# Altium PCB BUS.PcbDoc
Units mm, origin at the board's own origin, x right, y up, seen from the top; angles counter-clockwise.
Board outline 148 x 105 mm, 2 copper layers (Top Layer, Bottom Layer); 107 components, 66 nets, 411 pads, 108 vias.
Unrouted connection lines stored in the file: 1.
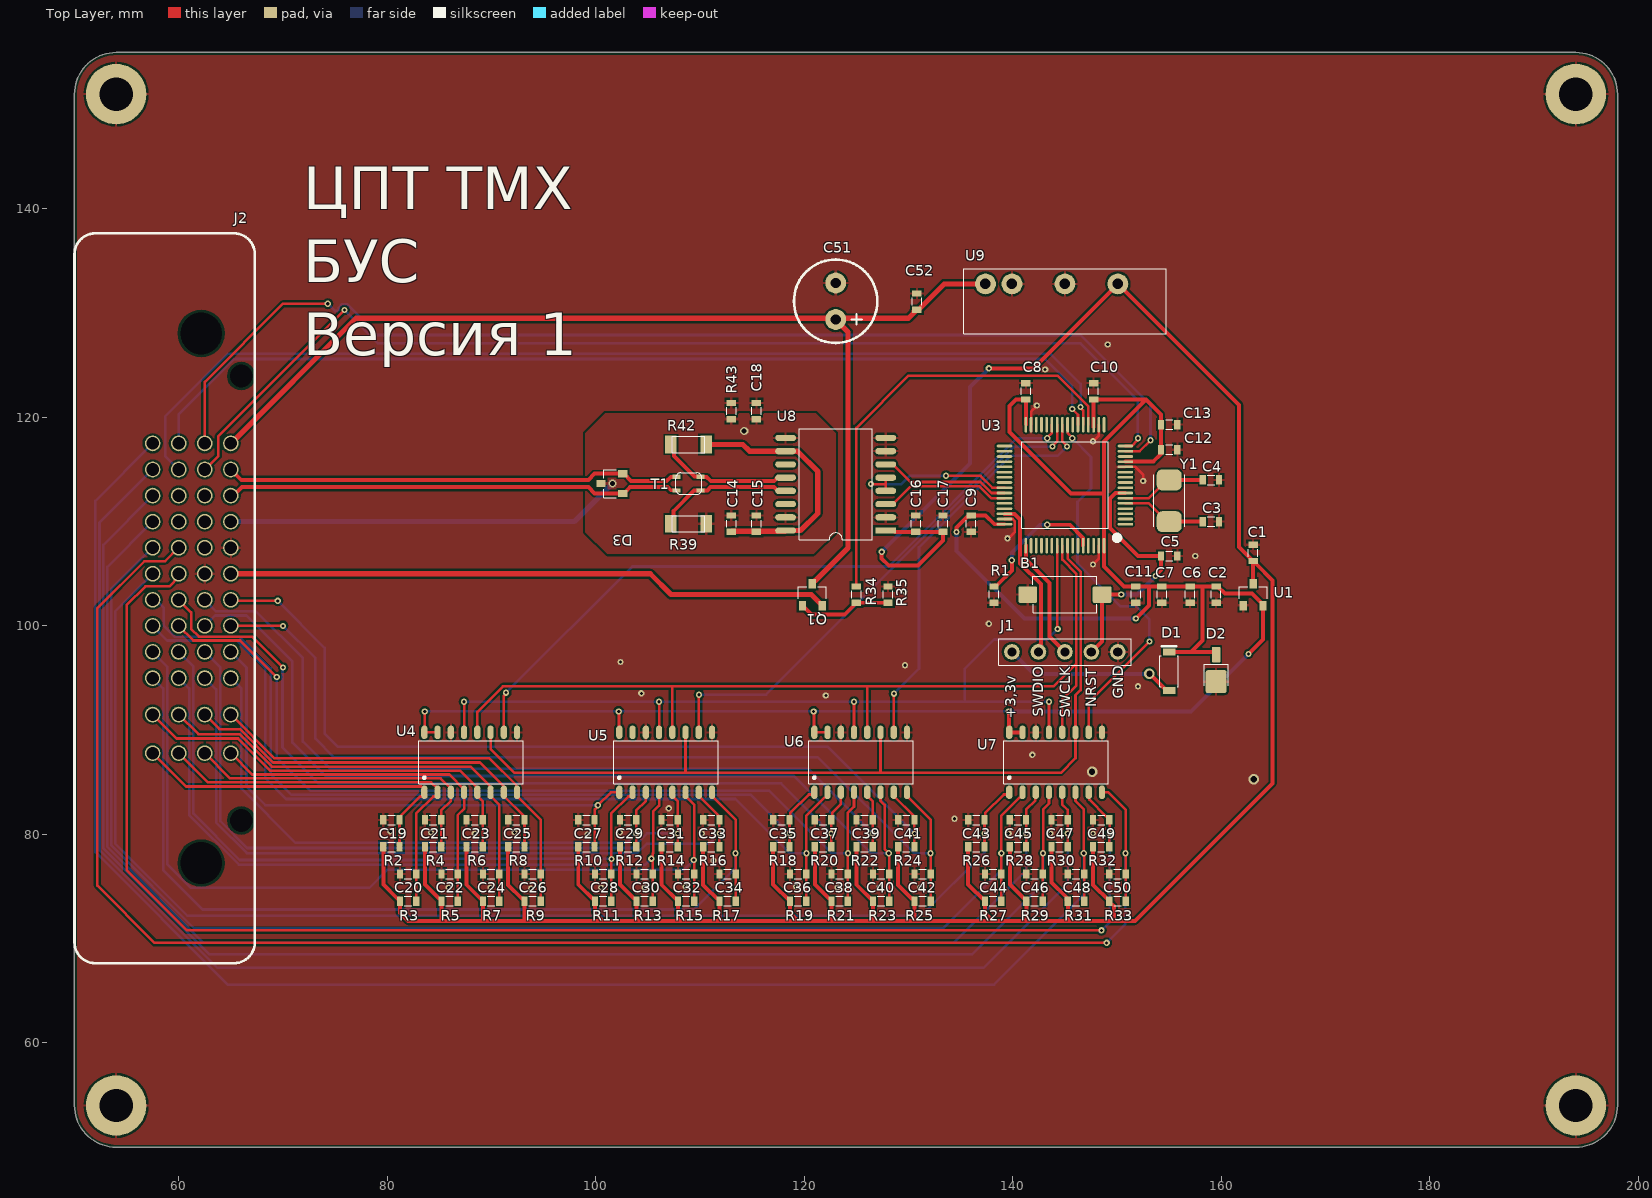
[diagram p0: Top Layer view]
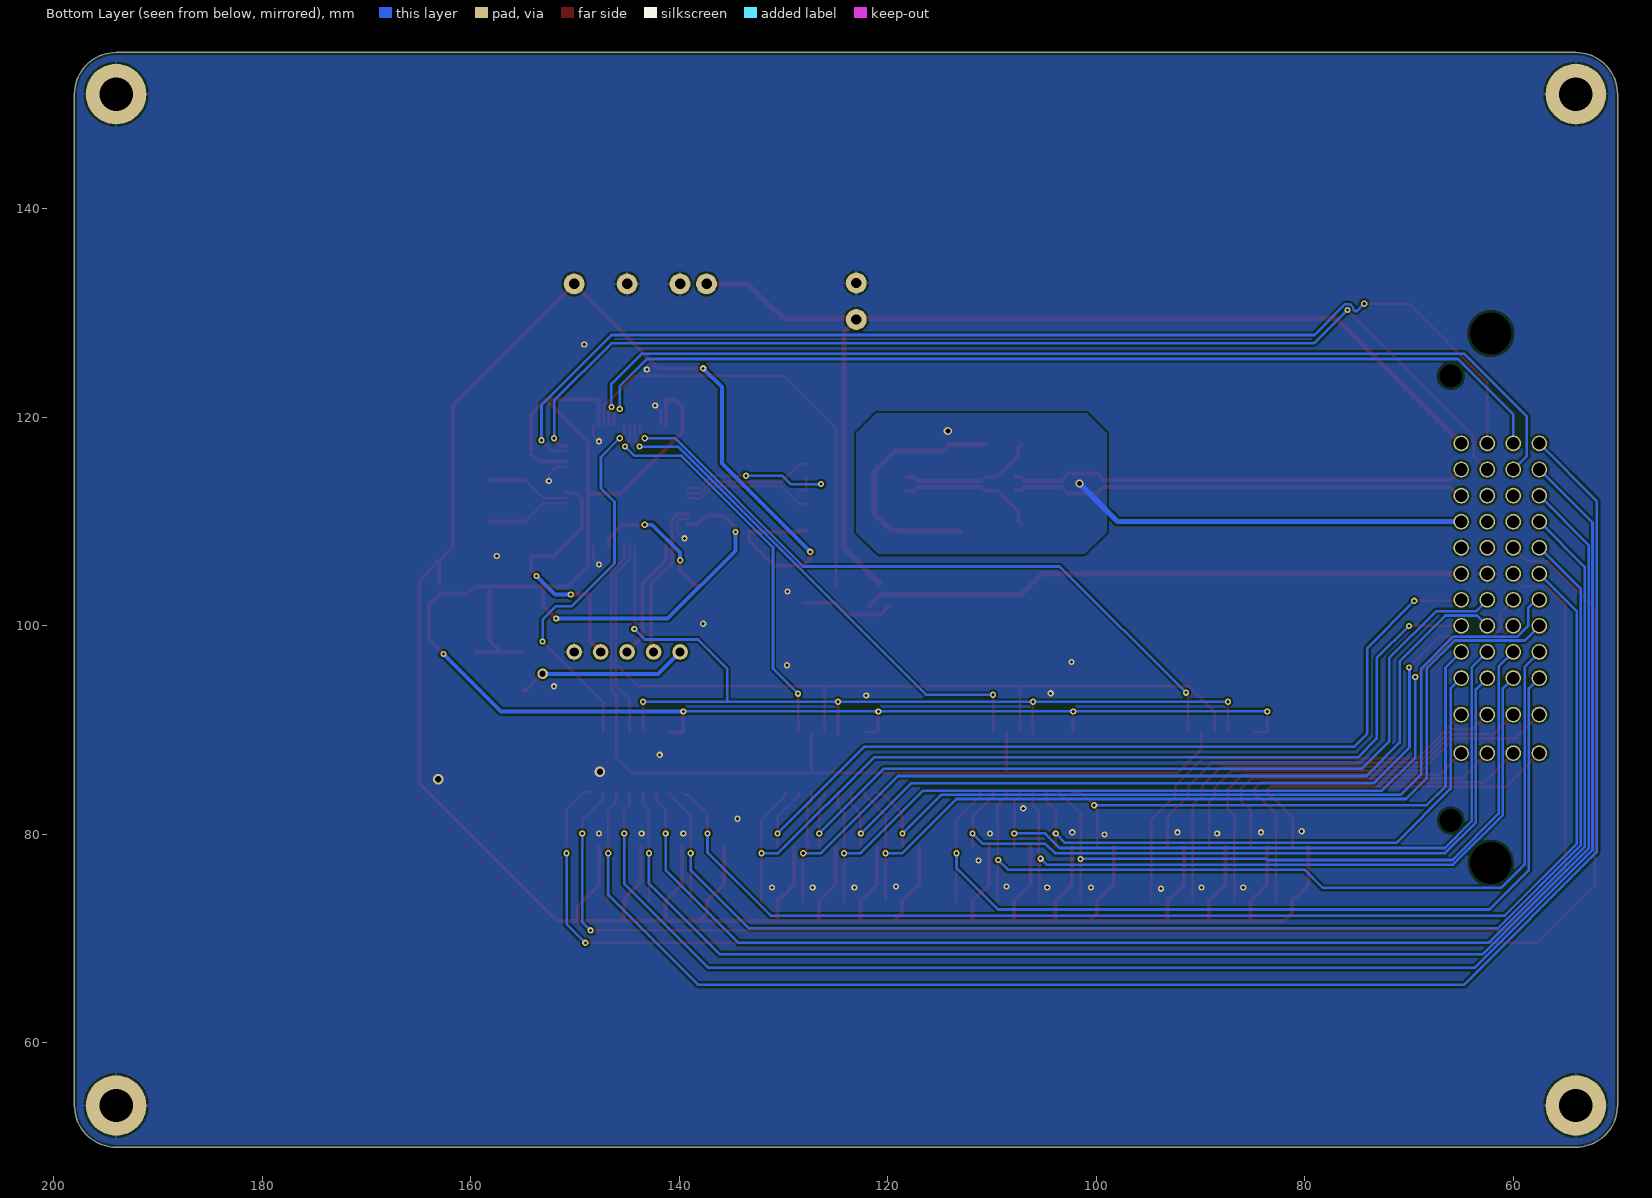
[diagram p1: Bottom Layer view, seen from below]
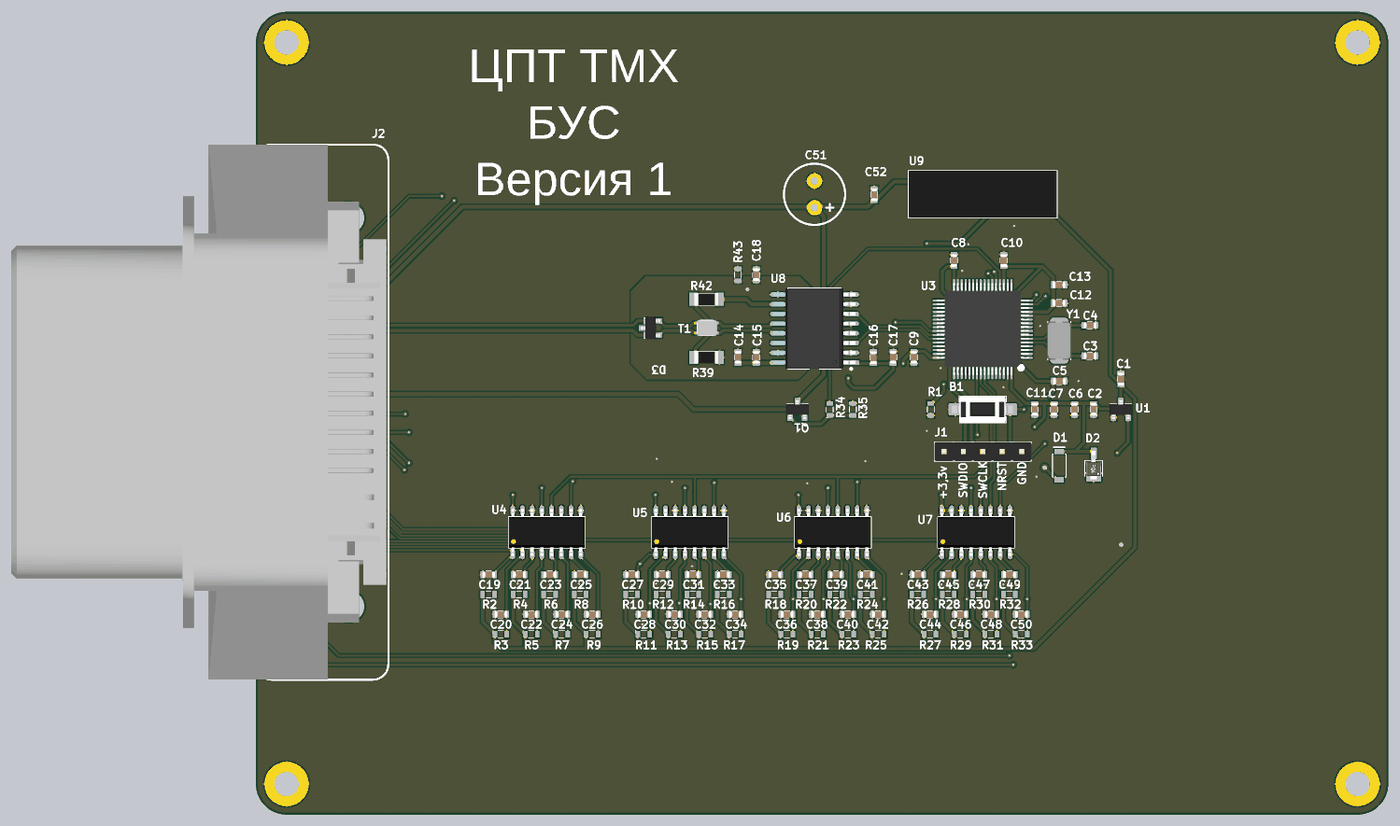
[diagram p2: 3D render of the assembled board from above, using the file's embedded part models]

## Layer stack, top to bottom
Top Solder: solder mask 0.0102, Solder Resist, Dk 3.5
Top Layer: signal copper 0.0356
Dielectric 1: dielectric 0.32, FR-4, Dk 4.8
Bottom Layer: signal copper 0.0356
Bottom Solder: solder mask 0.0102, Solder Resist, Dk 3.5

## Board outline
50,54 50,151 cw(c54,151) 54,155 194,155 cw(c194,151) 198,151 198,54 cw(c194,54) 194,50 54,50 cw(c54,54)

## Design rules (kind name [scope] priority, off if disabled: settings)
AcuteAngle [All] p1: minimum=3.50000000000000E+0001 checktracksonly=FALSE
BoardOutlineClearance "BoardOutlineClearance 1" [All] p1: gap=0.25 ignorepadtopadclearanceinfootprint=FALSE except(0: Arc-SplitContinuation Track-SplitContinuation SMDPad-SplitContinuation THPad-SplitContinuation Via-SplitContinuation Fill-SplitContinuation Poly-SplitContinuation Region-SplitContinuation Text-SplitContinuation) // Milling
Clearance "Clearance-1 1/2 Oz" [All] p1: gap=0.125 ignorepadtopadclearanceinfootprint=FALSE except(0.2: Arc-Fill Arc-Poly Track-Fill Track-Poly SMDPad-SMDPad SMDPad-Fill SMDPad-Poly THPad-Fill THPad-Poly Via-Fill Via-Poly Fill-Fill Fill-Poly Poly-Poly Poly-Region Poly-Text; 0.25: Arc-Hole Track-Hole SMDPad-Hole THPad-Hole Via-Hole Fill-Hole Poly-Hole Region-Hole Text-Hole) // Standart
ComponentClearance [All] p1: gap=0.1 collisioncheckmode=3 verticalgap=0.1 showdistances=FALSE
DiffPairsRouting "DiffPairsRouting 1/2 Oz" [All] p1: maxlimit=0.254 minlimit=0.125 mostfreqgap=0.254 toplayer_minwidth=0.125 toplayer_maxwidth=0.381 toplayer_prefwidth=0.381 bottomlayer_minwidth=0.125 bottomlayer_maxwidth=0.381 bottomlayer_prefwidth=0.381 maxuncoupledlength=12.7
Height [All] p1 off: minheight=0 maxheight=25.4 prefheight=12.7
HoleSize "Minimum HoleSize" [IsPad] p1: absolutevalues=TRUE maxlimit=5.9 minlimit=0.6 maxpercent=80.000 minpercent=20.000
HoleSize "Minimum HoleSize VIA 1" [IsVia] p2: absolutevalues=TRUE maxlimit=5.9 minlimit=0.3 maxpercent=80.000 minpercent=20.000 // Standart
HoleToHoleClearance Hole2HoleClearance [All] p1: gap=0.25 allowstackedmicrovias=FALSE
MinimumAnnularRing "Minimum AR VIA Standart" [All] p1: minimumring=0.15
MinimumAnnularRing "Minimum AR PAD Standart" [All] p2: minimumring=0.2
MinimumSolderMaskSliver "SolderMask Bridge Standart" [All] p1: minsoldermaskwidth=0.15 // All Masks
PlaneClearance "PlaneClearance-1 1/2 Oz" [All] p1: clearance=0.2 // Standart
PlaneConnect "TermalConnect-1 1/2 Oz" [All] p1: planeconnectstyle=Relief reliefexpansion=0.2 reliefentries=4 reliefconductorwidth=0.2 reliefairgap=0.2 // Standart
PolygonConnect "PolygonConnect-1 1/2 Oz" [All] p1: thpad.connectstyle=Relief thpad.reliefconductorwidth=0.254 thpad.reliefentries=4 thpad.polygonreliefangle="90 Angle" thpad.airgapwidth=0.2 smdpad.connectstyle=Relief smdpad.reliefconductorwidth=0.254 smdpad.reliefentries=4 smdpad.polygonreliefangle="90 Angle" smdpad.airgapwidth=0.2 via.connectstyle=Direct via.reliefconductorwidth=0.254 via.reliefentries=4 via.polygonreliefangle="90 Angle" via.airgapwidth=0.254 // Standart
RoutingCorners [All] p1 off: cornerstyle=45-Degree minsetback=2.54 maxsetback=2.54
RoutingVias [All] p1: holewidth=0.4 width=0.8 viastyle="Through Hole" minholewidth=0.3 minwidth=0.6 maxholewidth=5.9 maxwidth=8.9
SilkToSilkClearance Silk2SilkClearance [All] p1 off: silktosilkclearance=0.15
SilkToSolderMaskClearance Silk2SolderMaskClearance [IsPad] p1 off: minsilkscreentomaskgap=0.15 clearancetoexposedcopper=TRUE
SolderMaskExpansion SolderMaskExpansion-1 [All] p1: expansion=0.05 istentingtop=FALSE // Standart
UnRoutedNet [All] p1: checkbadconnections=TRUE
Width "Width 1/2 Oz" [All] p1: maxlimit=10 minlimit=0.125 preferedwidth=0.254 checkconnectedcopper=TRUE
18 further rules are at their usual default settings.

## Classes and differential pairs
net class TEMP[1..32]: TEMP1 TEMP2 TEMP3 TEMP4 TEMP5 TEMP6 TEMP7 TEMP8 TEMP9 TEMP10 TEMP11 TEMP12 TEMP13 TEMP14 TEMP15 TEMP16 TEMP17 TEMP18 TEMP19 TEMP20 TEMP21 TEMP22 TEMP23 TEMP24 TEMP25 TEMP26 TEMP27 TEMP28 TEMP29 TEMP30 TEMP31 TEMP32
component class Main: C51 C52 J2 U9
component class Bus: C14 C15 C16 C17 C18 D3 R39 R42 R43 T1 U8
component class ADC_4: C43 C44 C45 C46 C47 C48 C49 C50 R26 R27 R28 R29 R30 R31 R32 R33 U7
component class ADC_3: C35 C36 C37 C38 C39 C40 C41 C42 R18 R19 R20 R21 R22 R23 R24 R25 U6
component class ADC_2: C27 C28 C29 C30 C31 C32 C33 C34 R10 R11 R12 R13 R14 R15 R16 R17 U5
component class ADC_1: C19 C20 C21 C22 C23 C24 C25 C26 R2 R3 R4 R5 R6 R7 R8 R9 U4
component class MCU: B1 C1 C2 C3 C4 C5 C6 C7 C8 C9 C10 C11 C12 C13 D1 D2 J1 Q1 R1 R34 R35 U1 U3 Y1

## Components (designator, comment, footprint, x,y, rotation, side; value= is the part's Value field where it differs from the comment)
B1 "But" "BUTTON 6x3.5" 141.437,103 r90 top
C1 "1uF" "0603 Capicator" 163.05,107 r270 top
C2 "1uF" "0603 Capicator" 159.5,103 r90 top
C3 "10pF" "0603 Capicator" 159,110 r0 top
C4 "10pF" "0603 Capicator" 159,114 r0 top
C5 "0.1uF" "0603 Capicator" 155,106.7 r0 top
C6 "4.7uF" "0603 Capicator" 157,103 r90 top
C7 "0.1uF" "0603 Capicator" 154.3,103 r90 top
C8 "0.1uF" "0603 Capicator" 141.25,122.5 r270 top
C9 "0.1uF" "0603 Capicator" 136,109.8 r90 top
C10 "0.1uF" "0603 Capicator" 147.75,122.5 r270 top
C11 "0.1uF" "0603 Capicator" 151.8,103 r90 top
C12 "10nF" "0603 Capicator" 155,116.9 r180 top
C13 "1uF" "0603 Capicator" 155,119.3 r180 top
C14 "0.1uF" "0603 Capicator" 113,109.8 r90 top
C15 "10uF" "0603 Capicator" 115.4,109.8 r90 top
C16 "10uF" "0603 Capicator" 130.7,109.8 r270 top
C17 "0.1uF" "0603 Capicator" 133.3,109.8 r90 top
C18 "1nF" "0603 Capicator" 115.4,120.6 r90 top
C19 "4.7uF" "0603 Capicator" 80.4,81.4 r0 top
C20 "4.7uF" "0603 Capicator" 82,76.2 r0 top
C21 "4.7uF" "0603 Capicator" 84.393,81.4 r0 top
C22 "4.7uF" "0603 Capicator" 85.98,76.2 r0 top
C23 "4.7uF" "0603 Capicator" 88.387,81.4 r0 top
C24 "4.7uF" "0603 Capicator" 89.96,76.2 r0 top
C25 "4.7uF" "0603 Capicator" 92.38,81.4 r0 top
C26 "4.7uF" "0603 Capicator" 93.94,76.2 r0 top
C27 "4.7uF" "0603 Capicator" 99.1,81.4 r0 top
C28 "4.7uF" "0603 Capicator" 100.7,76.2 r0 top
C29 "4.7uF" "0603 Capicator" 103.093,81.4 r0 top
C30 "4.7uF" "0603 Capicator" 104.68,76.2 r0 top
C31 "4.7uF" "0603 Capicator" 107.087,81.4 r0 top
C32 "4.7uF" "0603 Capicator" 108.66,76.2 r0 top
C33 "4.7uF" "0603 Capicator" 111.08,81.4 r0 top
C34 "4.7uF" "0603 Capicator" 112.64,76.2 r0 top
C35 "4.7uF" "0603 Capicator" 117.8,81.4 r0 top
C36 "4.7uF" "0603 Capicator" 119.4,76.2 r0 top
C37 "4.7uF" "0603 Capicator" 121.793,81.4 r0 top
C38 "4.7uF" "0603 Capicator" 123.38,76.2 r0 top
C39 "4.7uF" "0603 Capicator" 125.787,81.4 r0 top
C40 "4.7uF" "0603 Capicator" 127.36,76.2 r0 top
C41 "4.7uF" "0603 Capicator" 129.78,81.4 r0 top
C42 "4.7uF" "0603 Capicator" 131.34,76.2 r0 top
C43 "4.7uF" "0603 Capicator" 136.5,81.4 r0 top
C44 "4.7uF" "0603 Capicator" 138.1,76.2 r0 top
C45 "4.7uF" "0603 Capicator" 140.493,81.4 r0 top
C46 "4.7uF" "0603 Capicator" 142.08,76.2 r0 top
C47 "4.7uF" "0603 Capicator" 144.487,81.4 r0 top
C48 "4.7uF" "0603 Capicator" 146.06,76.2 r0 top
C49 "4.7uF" "0603 Capicator" 148.48,81.4 r0 top
C50 "4.7uF" "0603 Capicator" 150.04,76.2 r0 top
C51 "120uF" "Bar Cap 8 mm" 123.01,131.137 r0 top
C52 "1uF" "0603 Capicator" 130.8,131.1 r270 top
D1 "Diode" sod-123 154.987,93.8 r90 top
D2 "TVS 3.3V" DO-216AA 159.5,95.75 r90 top
D3 "TVS" SOT-23 102.6,112.7 r90 top
J1 "PLS 5x1" "PLS 5x1" 150.08,97.5 r180 top
J2 "Conn 48" 5007620481 65,117.5 r270 top
Q1 "MOSFET-N" SOT-23 119.825,101.95 r0 top
R1 "3.9k" "0603 Resistor" 138.2,103 r270 top
R2 "300R" "0603 Resistor" 80.4,78.8 r180 top
R3 "300R" "0603 Resistor" 82,73.6 r180 top
R4 "300R" "0603 Resistor" 84.393,78.8 r180 top
R5 "300R" "0603 Resistor" 85.98,73.6 r180 top
R6 "300R" "0603 Resistor" 88.387,78.8 r180 top
R7 "300R" "0603 Resistor" 89.96,73.6 r180 top
R8 "300R" "0603 Resistor" 92.38,78.8 r180 top
R9 "300R" "0603 Resistor" 93.94,73.6 r180 top
R10 "300R" "0603 Resistor" 99.1,78.8 r180 top
R11 "300R" "0603 Resistor" 100.7,73.6 r180 top
R12 "300R" "0603 Resistor" 103.093,78.8 r180 top
R13 "300R" "0603 Resistor" 104.68,73.6 r180 top
R14 "300R" "0603 Resistor" 107.087,78.8 r180 top
R15 "300R" "0603 Resistor" 108.66,73.6 r180 top
R16 "300R" "0603 Resistor" 111.08,78.8 r180 top
R17 "300R" "0603 Resistor" 112.64,73.6 r180 top
R18 "300R" "0603 Resistor" 117.8,78.8 r180 top
R19 "300R" "0603 Resistor" 119.4,73.6 r180 top
R20 "300R" "0603 Resistor" 121.793,78.8 r180 top
R21 "300R" "0603 Resistor" 123.38,73.6 r180 top
R22 "300R" "0603 Resistor" 125.787,78.8 r180 top
R23 "300R" "0603 Resistor" 127.36,73.6 r180 top
R24 "300R" "0603 Resistor" 129.78,78.8 r180 top
R25 "300R" "0603 Resistor" 131.34,73.6 r180 top
R26 "300R" "0603 Resistor" 136.5,78.8 r180 top
R27 "300R" "0603 Resistor" 138.1,73.6 r180 top
R28 "300R" "0603 Resistor" 140.493,78.8 r180 top
R29 "300R" "0603 Resistor" 142.08,73.6 r180 top
R30 "300R" "0603 Resistor" 144.487,78.8 r180 top
R31 "300R" "0603 Resistor" 146.06,73.6 r180 top
R32 "300R" "0603 Resistor" 148.48,78.8 r180 top
R33 "300R" "0603 Resistor" 150.04,73.6 r180 top
R34 "160R" "0603 Resistor" 125,103 r270 top
R35 "1k" "0603 Resistor" 128.025,103 r270 top
R39 "390R" "1206 RESISTOR" 108.9,109.8 r0 top
R42 "390R" "1206 RESISTOR" 108.9,117.4 r180 top
R43 "1M" "0603 Resistor" 113,120.6 r90 top
T1 "ACM2520" ACM2520 110.05,113 r180 top
U1 "LDO 3V" SOT-23 162.1,101.95 r0 top
U3 "STM32F105RCT6" LQFP64 145,113.5 r180 top
U4 "ADC 8-channel" SOIC-16 83.56,84.04 r0 top
U5 "ADC 8-channel" SOIC-16 102.26,84.04 r0 top
U6 "ADC 8-channel" SOIC-16 120.96,84.04 r0 top
U7 "ADC 8-channel" SOIC-16 139.66,84.04 r0 top
U8 "RS-485" SOIC16W 123,113.5 r180 top
U9 "DC/DC" SIP7 137.375,132.8 r90 top
Y1 "8MHz" NX5032GA 155,112 r270 top

## Footprints (in the part's own frame and the unit in brackets; to place one, negate y for a bottom-side part, rotate by r counter-clockwise, add the part's x,y. Pads: shape width x height; smd on the part's side, far side on the other; paste and mask are expansions set on the pad)
"0603 Capicator" [mm]
  rect 0.6x0.9 smd: 1(-0.78,0) 2(0.78,0)
  silkscreen extent -0.35,-0.45 0.35,0.45, body extent -0.82,-0.45 0.88,0.45, height 0.9
"0603 Resistor" [mm]
  rect 0.6x0.9 smd: 1(-0.78,0) 2(0.78,0)
  silkscreen extent -0.35,-0.45 0.35,0.45, body extent -0.85,-0.45 0.85,0.45, height 0.55
"1206 RESISTOR" [mm] "smd"
  rect 1.1x1.7 smd: 1(-1.7,0) 2(1.7,0)
  silkscreen extent -1.55,-0.77 1.55,0.77, body extent -1.55,-0.77 1.55,0.78, height 0.55
5007620481 [mm] "Molex PCB Header 48 pin"
  round 1.5 hole 1.2: 1A(0,0) 1B(2.5,0) 1C(5,0) 1D(7.5,0) 1E(10,0) 1F(12.5,0) 1G(15,0) 1H(17.5,0) 1J(20,0) 1K(22.5,0) 1L(26,0) 1M(29.7,0) 2A(0,-2.5) 2B(2.5,-2.5) 2C(5,-2.5) 2D(7.5,-2.5) 2E(10,-2.5) 2F(12.5,-2.5) 2G(15,-2.5) 2H(17.5,-2.5) 2J(20,-2.5) 2K(22.5,-2.5) 2L(26,-2.5) 2M(29.7,-2.5) 3A(0,-5) 3B(2.5,-5) 3C(5,-5) 3D(7.5,-5) 3E(10,-5) 3F(12.5,-5) 3G(15,-5) 3H(17.5,-5) 3J(20,-5) 3K(22.5,-5) 3L(26,-5) 3M(29.7,-5) 4A(0,-7.5) 4B(2.5,-7.5) 4C(5,-7.5) 4D(7.5,-7.5) 4E(10,-7.5) 4F(12.5,-7.5) 4G(15,-7.5) 4H(17.5,-7.5) 4J(20,-7.5) 4K(22.5,-7.5) 4L(26,-7.5) 4M(29.7,-7.5)
  round 1.524 hole 4: 4(-10.55,-2.85) 7(40.25,-2.85)
  round 1.524 hole 2.2: 5(-6.45,1) 6(36.15,1)
  silkscreen extent -20.15,-15 49.85,2.3, body extent -20.11,-46.98 49.81,2.03, height 27.1
ACM2520 [mm]
  rect 0.8x0.4 smd: 1(0,0) 2(0,-1.3) 3(2.3,-1.3) 4(2.3,0)
  silkscreen extent -0.13,-1.68 2.4,0.38, body extent -0.11,-1.64 2.39,0.36, height 1.24
"Bar Cap 8 mm" [mm]
  round 2 hole 1: 1(0,1.75) 2(0,-1.75)
  silkscreen extent -4,-4 4,4
"BUTTON 6x3.5" [mm]
  rrect20% 1.6x1.8 smd: 1(0,0) 2(0,-7.125)
  silkscreen extent -1.75,-6.63 1.75,-0.48, body extent -1.75,-7.52 1.75,0.48, height 4.3
DO-216AA [mm]
  rrect20% 2.2x2 smd: 1(-1.1,0)
  rrect20% 1.5x0.8 smd: 2(1.5,0)
  silkscreen extent -1.5,-1.15 0.58,1.15, body extent -1.91,-0.93 1.85,0.98, height 1.02
LQFP64 [mm]
  oval 1.5x0.254 smd paste+0 mask+0.02: 1(-5.8,3.75) 2(-5.8,3.25) 3(-5.8,2.75) 4(-5.8,2.25) 5(-5.8,1.75) 6(-5.8,1.25) 7(-5.8,0.75) 8(-5.8,0.25) 9(-5.8,-0.25) 10(-5.8,-0.75) 11(-5.8,-1.25) 12(-5.8,-1.75) 13(-5.8,-2.25) 14(-5.8,-2.75) 15(-5.8,-3.25) 16(-5.8,-3.75) 33(5.8,-3.75) 34(5.8,-3.25) 35(5.8,-2.75) 36(5.8,-2.25) 37(5.8,-1.75) 38(5.8,-1.25) 39(5.8,-0.75) 40(5.8,-0.25) 41(5.8,0.25) 42(5.8,0.75) 43(5.8,1.25) 44(5.8,1.75) 45(5.8,2.25) 46(5.8,2.75) 47(5.8,3.25) 48(5.8,3.75)
  oval 0.254x1.5 smd paste+0 mask+0.02: 17(-3.75,-5.8) 18(-3.25,-5.8) 19(-2.75,-5.8) 20(-2.25,-5.8) 21(-1.75,-5.8) 22(-1.25,-5.8) 23(-0.75,-5.8) 24(-0.25,-5.8) 25(0.25,-5.8) 26(0.75,-5.8) 27(1.25,-5.8) 28(1.75,-5.8) 29(2.25,-5.8) 30(2.75,-5.8) 31(3.25,-5.8) 32(3.75,-5.8) 49(3.75,5.8) 50(3.25,5.8) 51(2.75,5.8) 52(2.25,5.8) 53(1.75,5.8) 54(1.25,5.8) 55(0.75,5.8) 56(0.25,5.8) 57(-0.25,5.8) 58(-0.75,5.8) 59(-1.25,5.8) 60(-1.75,5.8) 61(-2.25,5.8) 62(-2.75,5.8) 63(-3.25,5.8) 64(-3.75,5.8)
  silkscreen extent -5.2,-4.15 4.15,5.25, body extent -6,-6.02 6,5.98, height 1.56
NX5032GA [mm] "Crystal"
  rrect50% 2x2.4 smd: 1(-2,0) 2(2,0)
  silkscreen extent -2.5,-1.5 2.5,1.5, body extent -2.5,-1.6 2.5,1.6, height 1.5
"PLS 5x1" [mm] "Connector; Header; 5 Position"
  round 1.5 hole 0.9: 1(0,0) 2(2.54,0) 3(5.08,0) 4(7.62,0) 5(10.16,0)
  silkscreen extent -1.27,-1.27 11.43,1.27, body extent -1.28,-1.28 11.42,1.26, height 8.54
SIP7 [mm]
  round 2 hole 1: 1(0,0) 2(0,-2.54) 4(0,-7.62) 6(0,-12.7)
  silkscreen extent -4.77,-17.35 1.45,2.1, body extent -4.7,-17.27 1.39,2.03, height 10.16
sod-123 [mm]
  rect 0.7x1.2 smd: 1(0,0) 2(3.7,0)
  silkscreen extent 0.35,-0.9 4.25,0.87, body extent 0,-0.8 3.7,0.8
SOIC16W [mm]
  rect 2x0.6 smd: 1(-4.81,4.36)
  oval 2x0.6 smd: 2(-4.81,3.09) 3(-4.81,1.82) 4(-4.81,0.55) 5(-4.81,-0.72) 6(-4.81,-1.99) 7(-4.81,-3.26) 8(-4.81,-4.53) 9(4.79,-4.53) 10(4.79,-3.26) 11(4.79,-1.99) 12(4.79,-0.72) 13(4.79,0.55) 14(4.79,1.82) 15(4.79,3.09) 16(4.79,4.36)
  round 0.5 on Top Overlay mask+0.051: ""(-4.8,5.2)
  silkscreen extent -3.5,-5.39 3.48,5.21, body extent -5.35,-5.35 5.35,5.15, height 2.65
SOIC-16 [mm]
  oval 0.6x1.3 smd paste+0 mask+0.1: 1(0,0) 2(1.27,0) 3(2.54,0) 4(3.81,0) 5(5.08,0) 6(6.35,0) 7(7.62,0) 8(8.89,0) 9(8.89,5.75) 10(7.62,5.75) 11(6.35,5.75) 12(5.08,5.75) 13(3.81,5.75) 14(2.54,5.75) 15(1.27,5.75) 16(0,5.75)
  silkscreen extent -0.55,0.82 9.48,4.92, body extent -0.53,-0.19 9.44,5.94, height 1.78
SOT-23 [mm]
  rect 0.7x0.9 smd: 1(0,0) 2(1.9,0) 3(0.95,2.1)
  silkscreen extent -0.4,0.65 2.3,1.83, body extent -0.55,-0.17 2.45,2.23, height 1.1

## Part data
B1: library part "Button 2 Conn", "Button 2 Conn SMD", Manufacturer="KLS electronic co ltd", Part Number=L-KLS7-TS3608-5.0-180, ComponentLink1Description=Chip&Dip, ComponentLink1URL=https://www.chipdip.ru/product/kls7-ts3608-5.0-180-td-02xa, Type=Button
C1 C2 C13 C52: library part "Cap 1uF (0603)", "1uF X5R 25V 10% 0603", Manufacturer="Murata Manufacturing", Part Number=GRM188R61E105KAADD, ComponentLink1Description=Chip&Dip, ComponentLink1URL=https://www.chipdip.ru/product/grm188r61e105k, Type=Capacitor
C3 C4: library part "Cap 10pF (0603)", "10pF NP0 50V 5% 0603", Manufacturer="Murata Manufacturing", Part Number=GRM1885C1H100JA01D, ComponentLink1Description=Chip&Dip, ComponentLink1URL=https://www.chipdip.ru/product/grm1885c1h100j, Type=Capacitor
C5 C7 C8 C9 C10 C11 C14 C17: library part "Cap 0.1uF (0603)", "0.1uF X7R 16V 10% 0603", Manufacturer="Murata Manufacturing", Part Number=GRM188R71C104KA01D, ComponentLink1Description=Chip&Dip, ComponentLink1URL=https://www.chipdip.ru/product/grm188r71c104ka01d, Type=Capacitor
C6 C19 C20 C21 C22 C23 C24 C25 C26 C27 C28 C29 C30 C31 C32 C33 C34 C35 C36 C37 C38 C39 C40 C41 C42 C43 C44 C45 C46 C47 C48 C49 C50: library part "Cap 4.7uF (0603)", "4.7uF X5R 25V 10% 0603", Manufacturer="Murata Manufacturing", Part Number=GRM188R61E475KE11D, ComponentLink1Description=Chip&Dip, ComponentLink1URL=https://www.chipdip.ru/product0/9000348448, Type=Capacitor
C12: library part "Cap 10nF (0603)", "10nF X7R  100V 10% 0603", Manufacturer="Murata Manufacturing", Part Number=GRM188R72A103KA01D, ComponentLink1Description=Chip&Dip, ComponentLink1URL=https://www.chipdip.ru/product/grm188r72a103ka01d, Type=Capacitor
C15 C16: library part "Cap 10uF (0603)", "10uF X5R 25V 20% 0603", Manufacturer="Murata Manufacturing", Part Number=GRM188R61E106M, ComponentLink1Description=Chip&Dip, ComponentLink1URL=https://www.chipdip.ru/product/grm188r61e106m, Type=Capacitor
C18: library part "Cap 1nF (0603)", "X7R 1nF 100V 10% 0603", Manufacturer="Murata Manufacturing", Part Number=GRM188R72A102KA01D, ComponentLink1Description=Chip&Dip, ComponentLink1URL=https://www.chipdip.ru/product/grm188r72a102ka01d, Type=Capacitor
C51: library part "Cap Pol 120uF", "Polymer capacitor with low E.S.R. Rated voltage - 80V.", Manufacturer=Matsushita, PartNumber=EEU-FS1K121LB, ComponentLink1Description=ChipDip, ComponentLink1URL=https://www.chipdip.ru/product0/8001968680, Type=Capacitor
D1: library part "Diode Schottky (SOD-123)", "0.5 A, Low Forward Voltage less than 385 mV, 400 mW Power Dissipation Package", Manufacturer="ON Semiconductor", Part Number=MBR0520L, ComponentLink1Description=DataSheet, ComponentLink1URL=http://www.farnell.com/datasheets/1875336.pdf, ComponentLink2Description=Chip&Dip, ComponentLink2URL=https://www.chipdip.ru/product/mbr0520l, Type=Diode
D2: library part "TVS Diode 3.3V [SM2T]", "High peak pulse power: 200 W (10/1000 μs)", Manufacturer=STMicroelectronics, Part Number=SM2T3V3A, ComponentLink1Description=DataSheet, ComponentLink1URL=https://www.st.com/resource/en/datasheet/sm2t3v3a.pdf, ComponentLink2Description=Chip&Dip, ComponentLink2URL=https://www.chipdip.ru/product0/8283670575, Type=Diode
D3: library part "TVS Diode Arrays", "The SM24CANB TVS Diode Array is designed to protect automotive Controller Area Network (CAN) lines from damage due to electrostatic discharge (ESD), electrical fast transient (EFT), and other overvoltage transients.", Manufacturer=Littelfuse, Part Number=SM24CANB-02HTG, ComponentLink1Description=DataSheet, ComponentLink1URL=https://m.littelfuse.com/~/media/electronics/datasheets/tvs_diode_arrays/littelfuse_tvs_diode_array_sm24canb_datasheet.pdf.pdf, ComponentLink2Description=Chip&Dip, ComponentLink2URL=https://www.chipdip.ru/product1/8001779022, Type=Diode
J1: library part "Conn 5 (PLS)", "Header, 5-Pin"
J2: library part "Conn 48 (Molex)", "Molec 48 pin PCB Header 5007620481", Manufacturer=Molex, Part Number=5007620481, ComponentLink1Description=ChipDip, ComponentLink1URL=https://www.chipdip.ru/product0/8004298252, ComponentLink2Description=Promelec, ComponentLink2URL=https://www.promelec.ru/product/427663/, ComponentLink3Description=Datasheet, ComponentLink3URL=https://static.chipdip.ru/lib/148/DOC030148367.pdf, Type=Connector
Q1: library part "MOSFET-N [IRLML]", "VDS 30V,  VGS Max ± 20V, RDS 27-40mΩ,", Manufacturer="Infineon Technologies", Part Number=IRLML0030TRPBF, ComponentLink1Description=DataSheet, ComponentLink1URL=https://static.chipdip.ru/lib/300/DOC000300382.pdf, ComponentLink2Description=Chip&Dip, ComponentLink2URL=https://www.chipdip.ru/product/irlml0030trpbf, Type=Transistor
R1: library part "Res 3.9k (0603)", "0.1W 0603 3.9k, 1%", Manufacturer=Taiwan, Part Number=RC0603FR-073K9L, ComponentLink1Description=Chip&Dip, ComponentLink1URL=https://www.chipdip.ru/product0/9000079726, Type=Resistor
R2 R3 R4 R5 R6 R7 R8 R9 R10 R11 R12 R13 R14 R15 R16 R17 R18 R19 R20 R21 R22 R23 R24 R25 R26 R27 R28 R29 R30 R31 R32 R33: library part "Res 300R (0603)", "0.1W 0603 300R, 1%", Manufacturer=Taiwan, Part Number=RC0603FR-07360RL, ComponentLink1Description=Chip&Dip, ComponentLink1URL=https://www.chipdip.ru/product0/9000079629, Type=Resistor
R34: library part "Res 160R (0603)", "0.1W 0603 160R, 1%", Manufacturer=Taiwan, Part Number=RC0603FR-07160RL, ComponentLink1Description=Chip&Dip, ComponentLink1URL=https://www.chipdip.ru/product/0.1w-0603-160-om-1, Type=Resistor
R35: library part "Res 1k (0603)", "0.1W 0603 1k, 1%", Manufacturer=Taiwan, Part Number=RC0603FR-071KL, ComponentLink1Description=Chip&Dip, ComponentLink1URL=https://www.chipdip.ru/product0/9000079676, Type=Resistor
R39 R42: library part "Res 390R (1206)", "0.25W 1206 390R", Manufacturer=Taiwan, Part Number=RC1206JR-07390KL, ComponentLink1Description=Chip&Dip, ComponentLink1URL=https://www.chipdip.ru/product0/8023504304, Type=Resistor
R43: library part "Res 1M (0603)", "0.1W 0603 1M, 1%", Manufacturer=Taiwan, Part Number=RC0603FR-071ML, ComponentLink1Description=Chip&Dip, ComponentLink1URL=https://www.chipdip.ru/product0/9000079784, Type=Resistor
T1: "Common mode filters / Automotive signal line (for power train/safety)", Manufacturer=TDK, Part Number=ACM2520-301-2P-T002, ComponentLink1Description=DataSheet, ComponentLink1URL=https://product.tdk.com/system/files/dam/doc/product/emc/emc/cmf_cmc/catalog/cmf_commercial_signal_acm2520_en.pdf, ComponentLink2Description=ChipDip, ComponentLink2URL=https://www.chipdip.ru/product0/8008480337?ysclid=lw4t4jsj9a923851487, Type=Inductor
U1: library part "LDO 3,3V [MCP]", "MCP1702 Low Dropout Voltage Regulator. The input operating range is specifiedfrom 2.7V to 13.2V", Manufacturer=Microchip, Part Number=MCP1702T-3002E/CB, ComponentLink1Description=DataSheet, ComponentLink1URL=https://static.chipdip.ru/lib/986/DOC003986671.pdf, ComponentLink2Description=Chip&Dip, ComponentLink2URL=https://www.chipdip.ru/product/mcp1702t-3002e-cb-microchip
U3: "MCU ARM 256KB FLASH MEM 64-LQFP", Manufacturer=STMicroelectronics, ComponentLink1Description=DataSheet, ComponentLink1URL=https://static.chipdip.ru/lib/375/DOC011375072.pdf, ComponentLink2Description=Chip&Dip, ComponentLink2URL=https://www.chipdip.ru/product/stm32f105rct6, Part Number=STM32F105RCT6, Type=IC
U4 U5 U6 U7: library part MCP3008-I/SL, "A/D converter with SPI serial interface", Manufacturer=Microchip, ComponentLink1Description=ChipDip, ComponentLink1URL=https://www.chipdip.ru/product/mcp3008-i-sl, ComponentLink2Description=Datadheet, ComponentLink2URL=https://static.chipdip.ru/lib/527/DOC011527685.pdf, Part Number=MCP3008-I/SL, Type=IC
U8: library part TDA51S485HC, "Isolated RS-485 Half-Duplex tranciever", Manufacturer=Mornsun, ComponentLink1Description=ChipDip, ComponentLink1URL=https://www.chipdip.ru/product0/8009281357, ComponentLink2Description=Datasheet, ComponentLink2URL=https://www.mornsun-power.com/html/pdf/TDA51S485HC.html, Part Number=TDA51S485HC, Type=IC
U9: library part "DC/DC Isolated 24V-5V [TMH]", "The TMH series are ultra miniature, isolated 2 Watt DC/DC-converters in a Single-in-Line  package  (SIP)", Manufacturer="Traco Power", Part Number=TMH2405S, ComponentLink1Description=Chip&Dip, ComponentLink1URL=https://www.chipdip.ru/product/tmh-2405s, ComponentLink2Description=DataSheet, ComponentLink2URL=https://static.chipdip.ru/lib/005/DOC001005854.pdf, Type=IC
Y1: library part "Crystal 8MHz", "Crystal NX5032GA", Manufacturer="Nihon Dempa Kogio (NDK)", Part Number=NX5032GA-8MHz, ComponentLink1Description=Chip&Dip, ComponentLink1URL=https://www.chipdip.ru/product0/9000523954, Type=Crystal

## Free pads (board coordinates)
  round 5.8 hole 3.2: 0(54,54) 0(54,151) 0(194,54) 0(194,151)

## Via types
v1: diameter 0.6, hole 0.3, Top Layer to Bottom Layer, tented both sides, 103 vias
v2: diameter 1, hole 0.6, Top Layer to Bottom Layer, tented both sides, 3 vias
v3: diameter 0.8, hole 0.5, Top Layer to Bottom Layer, tented both sides, 2 vias

## Nets (pads, with @x,y where several pads share a name; then routed paths per layer and width w, separated by ;. In a path a pad name is that pad's centre, name@x,y a point inside that pad or via, vN(x,y) a via of type N, cw(c..) or ccw(c..) an arc to the next point about the centre after c; other vN are vias at no path point)
+3,3V: C2.2 C6.2 C7.2 C8.2 C9.2 C10.2 C11.2 C12.2 C13.2 D1.2 D2.2 U1.2 U3.13 U3.19 U3.32 U3.48 U3.64 U4.15 U4.16 U5.15 U5.16 U6.15 U6.16 U7.15 U7.16 | length 210.6
  Top Layer w0.25: v1(83.6,91.8) 83.58,91.78 83.58,89.81 U4.16 U4.15 ; v1(102.2,91.8) 102.23,91.77 102.23,89.82 U5.16 ; v1(120.9,91.8) 120.93,91.77 120.93,89.82 U6.16 U6.15
  Top Layer w0.381: v1(134.6,109) 134.619,109.019 134.619,109.451 135.639,110.471 135.89,110.471 C9.2 ; C9.2@135.865,110.6 137.4,110.6 138.25,109.75 U3.48 ; v1(139.6,91.8) 139.63,91.77 139.63,89.82 U7.16 U7.15 ; U3.32 C8.2 140.32,121.72 139.7,121.1 139.7,118.6 145.6,112.7 148.75,112.7 ; U3.19@147.75,119.057 U3.19 C10.2 152.78,121.72 ; U3.13 153.47,115.75 C12.2@154.22,116.5 ; v1(151.8,100.7) 153.05,101.95 153.05,103.78 ; C12.2 C13.2 154.22,120.28 152.78,121.72 ; D1.2 157.1,97.5 ; D2.2@159.5,97.5 157.1,97.5 ; v1(162.6,97.3) 164,98.7 U1.2 ; U1.2@164,102 164,102.05 162.95,103.1 160.33,103.1 159.65,103.78 C2.2 158.5,103.78 158.2,103.78 ; 148.75,112.7 148.75,117.69 152.78,121.72 ; 148.75,112.7 U3.64 148.75,105.68 150.65,103.78 C11.2 153.05,103.78 ; 153.05,103.78 C7.2 C6.2 158.2,103.78 ; 157.1,97.5 158.2,98.6 158.2,103.78
  Bottom Layer w0.25: v1(83.6,91.8) v1(102.2,91.8) v1(120.9,91.8) v1(139.6,91.8)
  Bottom Layer w0.381: v1(134.6,109) 134.6,107.2 141.1,100.7 v1(151.8,100.7) ; v1(139.6,91.8) 157.1,91.8 v1(162.6,97.3)
+5V: C1.2 C16.2 C17.1 R2.2 R3.2 R4.2 R5.2 R6.2 R7.2 R8.2 R9.2 R10.2 R11.2 R12.2 R13.2 R14.2 R15.2 R16.2 R17.2 R18.2 R19.2 R20.2 R21.2 R22.2 R23.2 R24.2 R25.2 R26.2 R27.2 R28.2 R29.2 R30.2 R31.2 R32.2 R33.2 U1.3 U8.1 U9.6 | length 322.2
  Top Layer w0.381: R2.2 79.62,75.2 80.96,73.86 81.111,73.86 81.22,73.75 R3.2 81.22,72.48 82,71.7 85.2,71.7 ; R4.2 83.613,75.187 R5.2 85.2,71.7 ; R6.2 87.607,75.173 88.921,73.86 89.071,73.86 89.18,73.75 R7.2 89.18,71.72 ; R8.2 91.6,75.16 92.901,73.86 93.051,73.86 93.16,73.75 R9.2 93.16,71.7 ; R10.2 98.32,75.2 R11.2 99.92,72.48 100.7,71.7 ; R12.2 102.313,75.187 R13.2 103.9,71.7 ; R14.2 106.307,75.173 R15.2 107.88,71.72 ; R16.2 110.3,75.16 R17.2 111.86,71.7 ; R18.2 117.02,75.2 R19.2 118.62,72.48 119.4,71.7 ; R20.2 121.013,75.187 R21.2 122.6,71.7 ; R22.2 125.007,75.173 R23.2 126.58,71.72 ; v1(127.424,107.1) 127.424,106.476 128.1,105.8 130.9,105.8 133.3,108.2 C17.1 C16.2 128.63,109.02 128.51,109.14 U8.1 ; R24.2 129,75.16 130.301,73.86 130.451,73.86 130.56,73.75 R25.2 130.56,71.76 ; R26.2 135.72,75.2 R27.2 137.32,72.48 138.1,71.7 ; v1(137.7,124.7) 141.975,124.7 U9.6 161.7,121.175 161.7,107.57 C1.2 ; R28.2 139.713,75.187 R29.2 141.3,71.7 ; R30.2 143.707,75.407 145.171,73.943 145.171,73.709 R31.2 145.28,71.72 ; R32.2 147.7,75.16 R33.2 149.26,73.45 149.37,73.34 149.477,73.34 149.7,73.117 149.7,71.7 ; U1.3 C1.2 ; 85.2,71.7 93.16,71.7 ; 93.16,71.7 100.7,71.7 ; 100.7,71.7 119.4,71.7 ; 119.4,71.7 138.1,71.7 ; 138.1,71.7 141.3,71.7 ; 141.3,71.7 149.7,71.7 ; 149.7,71.7 151.7,71.7 164.9,84.9 164.9,104.37 163.31,105.96 163.31,106.11 163.2,106.22 C1.2
  Bottom Layer w0.381: v1(127.424,107.1) 135.9,115.576 135.9,122.9 v1(137.7,124.7)
+24V: C51.2 C52.2 J2.1A Q1.3 U9.1 | length 106.1
  Top Layer w0.5: J2.1A 77,129.5 129.98,129.5 130.54,130.06 130.54,130.21 130.65,130.32 C52.2 130.95,130.32 133.43,132.8 U9.1 ; Q1.3 120.775,104.15 120.935,104.31 121.035,104.31 124.2,107.475 124.2,128.197 C51.2
BOOT: R1.1 U3.60 | length 13.2
  Top Layer w0.381: R1.1 138.309,103.889 138.459,103.889 139.9,105.33 v1(139.9,106.3) ; v1(143.3,109.7) 145.499,109.7 146.75,108.449 U3.60
  Bottom Layer w0.381: v1(139.9,106.3) 139.942,106.342 139.942,107.042 142.6,109.7 v1(143.3,109.7)
Coil: J2.1F Q1.2 | length 58
  Top Layer w0.5: J2.1F 105.22,105 107.22,103 120.675,103 Q1.2
CS_feedback: J2.3B U3.21 | length 101.1
  Top Layer w0.25: v1(146.5,121) 146.5,120.905 146.75,120.655 U3.21
  Bottom Layer w0.25: J2.3B 58.7,116.3 58.7,120.1 64.695,126.095 143.605,126.095 146.5,123.2 v1(146.5,121)
CS_signal: J2.3A U3.22 | length 95.5
  Top Layer w0.25: v1(145.7,120.8) 146.249,120.251 U3.22@146.249,119.301
  Bottom Layer w0.25: J2.3A@60.008,117.737 60.008,120.308 65.3,125.6 143.1,125.6 145.7,123 v1(145.7,120.8)
Gate: R34.1 U3.20 | length 42.5
  Top Layer w0.25: R34.1 125,119 130,124 144.3,124 147.25,121.05 U3.20
GND: B1.1 C1.1 C2.1 C3.2 C4.2 C5.2 C6.1 C7.1 C8.1 C9.1 C10.1 C11.1 C12.1 C13.1 C16.1 C17.2 C18.2 C19.1 C20.1 C21.1 C22.1 C23.1 C24.1 C25.1 C26.1 C27.1 C28.1 C29.1 C30.1 C31.1 C32.1 C33.1 C34.1 C35.1 C36.1 C37.1 C38.1 C39.1 C40.1 C41.1 C42.1 C43.1 C44.1 C45.1 C46.1 C47.1 C48.1 C49.1 C50.1 C51.1 C52.1 D2.1 J1.1 J2.1E J2.2F pad.0 R1.2 R35.1 R43.2 U1.1 U3.12 U3.18 U3.31 U3.47 U3.63 U4.9 U4.14 U5.9 U5.14 U6.9 U6.14 U7.9 U7.14 U8.2 U8.7 U8.8 U9.2 U9.4 | length 11.6
  Top Layer w0.25: U3.47@139.201,110.249 139.985,110.249 140.2,110.034 140.2,109 140.021,108.821 140.015,108.821 139.595,108.4 v1(139.5,108.4) ; U3.31 141.75,120.55 v1@142.3,121.1 ; v1(147.7,105.9) 148.25,106.45 U3.63 ; v1(147.7,117.7) 148.25,118.25 U3.18 ; U3.12 151.751,115.249 152.5,114.5 v1(152.5,113.9)
  other v1: 93.8,74.8 85.9,74.9 89.9,74.9 100.5,74.9 104.7,74.9 123.2,74.9 127.2,74.9 131.1,74.9 108.6,75 119.2,75 111.3,77.5 99.2,80 88.4,80.1 110.2,80.1 139.6,80.1 143.6,80.1 147.7,80.1 84.2,80.2 92.2,80.2 102.3,80.2 80.3,80.3 134.4,81.5 107,82.5 141.87,87.63 122.07,93.33 104.37,93.53 152,94.2 129.67,96.23 102.37,96.53 137.7,100.2 129.6,103.3 157.5,106.7 142.302,121.128 143.1,124.6 149.1,127
  other v2: 163.1,85.3 147.6,86
GND_RS485: C14.2 C15.2 C18.1 D3.3 J2.1D R39.2 R43.1 U8.9 U8.15 | length 38.4
  Top Layer w0.5: J2.1D J2.1D@65.271,110
  Bottom Layer w0.5: J2.1D 97.95,110 v3(101.6,113.65)
  other v3: 114.225,118.7
MISO: U3.56 U4.12 U5.12 U6.12 U7.12 | length 89.2
  Top Layer w0.25: U4.12 88.64,91.74 91.1,94.2 107.34,94.2 ; U5.12 107.34,94.2 ; U6.12 126.04,94.2 ; U7.12 144.74,92.94 146.1,94.3 146.1,96.4 ; U3.56 144.75,106.35 146.1,105 146.1,96.4 ; 107.34,94.2 126.04,94.2 ; 126.04,94.2 143.9,94.2 146.1,96.4
MOSI: U3.57 U4.11 U5.11 U6.11 U7.11 | length 88.4
  Top Layer w0.25: U4.11 89.91,88.21 92.22,85.9 108.61,85.9 108.7,85.9 ; U5.11 108.61,85.99 108.7,85.9 ; U6.11 127.31,86.01 127.2,85.9 ; U3.57@145.25,107.902 U3.57 145.25,106.45 146.5,105.2 146.5,93.844 146.01,93.354 146.01,90.045 U7.11 146.01,87.31 144.6,85.9 127.31,85.9 127.2,85.9 ; 108.7,85.9 127.2,85.9
NetC3_1: C3.1 U3.5 Y1.2 | length 8.1
  Top Layer w0.25: U3.5 153.05,111.75 Y1.2@154.8,110
  Top Layer w0.381: Y1.2@154.8,110 Y1.2 C3.1
NetC4_1: C4.1 U3.6 Y1.1 | length 8.1
  Top Layer w0.25: U3.6 153.05,112.25 Y1.1@154.8,114
  Top Layer w0.381: Y1.1@154.8,114 Y1.1 C4.1
NetD1_1: D1.1 J1.5 | length 16.6
  Top Layer w0.381: v2(153.1,95.4) 153.137,95.4 154.737,93.8 D1.1
  Bottom Layer w0.381: J1.5 142.02,95.4 v2(153.1,95.4)
NetQ1_1: Q1.1 R34.2 R35.2 | length 9
  Top Layer w0.381: Q1.1 120.675,101.1 123.88,101.1 R34.2 R35.2
NetR39_1: R39.1 T1.1 U8.13 | length 13.1
  Top Layer w0.381: R39.1 107.449,110.049 107.449,110.998 109.442,112.99 110.04,112.99 T1.1 ; T1.1@110.1,113 110.7,113 111.025,113.325 117.108,113.325 117.483,112.95 U8.13
NetR42_2: R42.2 T1.2 U8.12 | length 13.1
  Top Layer w0.381: R42.2 107.523,117.077 107.523,116.277 109.491,114.309 110.04,114.309 T1.2 ; T1.2@110.02,114.3 110.029,114.29 110.635,114.29 111.05,113.875 117.106,113.875 117.451,114.22 U8.12
NetU3_24: U3.24 U7.10 | length 37.1
  Top Layer w0.25: U3.24@145.251,119.299 145.251,118.505 145.7,118.056 v1(145.7,118) ; U7.10 147.29,89.8 147.29,92.69 v1(153.1,98.5)
  Bottom Layer w0.25: v1(145.7,118) 147.5,116.2 147.5,113.2 146.2,111.9 146.2,106 150.3,101.9 151.8,101.9 153.1,100.6 v1(153.1,98.5)
NetU3_25: U3.25 U6.10 | length 39.2
  Top Layer w0.25: U6.10 128.59,89.8 128.59,93.49 v1(128.6,93.5) ; U3.25 144.75,117.705 145.2,117.255 v1(145.2,117.2)
  Bottom Layer w0.25: v1(128.6,93.5) 131,95.9 131,107.539 139.761,116.3 144.3,116.3 v1(145.2,117.2)
NetU3_26: U3.26 U5.10 | length 49.7
  Top Layer w0.25: U5.10 109.89,89.8 109.89,93.39 v1(109.9,93.4) ; v1(143.8,117.2) 143.8,117.255 144.25,117.705 U3.26
  Bottom Layer w0.25: v1(109.9,93.4) 116.33,93.4 140.13,117.2 v1(143.8,117.2)
NetU3_27: U3.27 U4.10 | length 67.4
  Top Layer w0.25: U4.10 91.19,89.8 91.19,93.295 91.4,93.505 v1(91.4,93.6) ; v1(143.3,118) 143.3,118.056 143.749,118.505 U3.27@143.749,119.299
  Bottom Layer w0.25: v1(91.4,93.6) 103.5,105.7 128.1,105.7 140.4,118 v1(143.3,118)
NetU3_41: U3.41 U8.4 U8.5 | length 17
  Top Layer w0.25: v1(126.4,113.6) 127.81,113.6 ; U8.5 127.81,113.6 ; U8.4@128.55,112.95 U8.4 127.81,113.6 ; v1(133.6,114.4) 136.9,114.4 138.05,113.25 U3.41
  Bottom Layer w0.25: v1(126.4,113.6) 129.3,113.6 130.1,114.4 v1(133.6,114.4)
NetU3_42: U3.42 U8.6 | length 12.5
  Top Layer w0.25: U8.6 128.51,115.49 130.2,113.8 136.9,113.8 137.95,112.75 U3.42
NetU3_43: U3.43 U8.3 | length 12.6
  Top Layer w0.25: U8.3 128.51,111.68 130.23,113.4 136.77,113.4 137.92,112.25 U3.43
NRST: B1.2 C5.1 J1.2 U3.7 | length 24.5
  Top Layer w0.381: J1.2 148.562,98.522 B1.2 v1(150.4,103) ; U3.7 149.85,112.75 149.3,112.2 149.3,109.4 152,106.7 C5.1 154.21,106.69 154.21,105.369 153.688,104.847 v1(153.688,104.788)
  Bottom Layer w0.381: v1(150.4,103) 151.9,103 v1(153.688,104.788)
RS485_A: D3.2 J2.1B T1.3 | length 43.9
  Top Layer w0.381: J2.1B 66,114 99.3,114 99.9,114.6 102.7,114.6 103.4,113.9 106.8,113.9 107.19,114.29 107.74,114.29 T1.3
RS485_B: D3.1 J2.1C T1.4 | length 43.7
  Top Layer w0.381: J2.1C 65.269,112.5 66.069,113.3 99.3,113.3 99.9,112.7 102.7,112.7 103.306,113.306 106.894,113.306 107.191,113.009 107.74,113.009 T1.4
SCK: U3.55 U4.13 U5.13 U6.13 U7.13 | length 89.8
  Top Layer w0.25: U4.13 v1(87.37,92.73) ; U5.13@106.07,89.578 U5.13 v1(106.07,92.73) ; U6.13@124.77,89.559 U6.13 v1(124.77,92.73) ; U7.13@143.47,90 v1(143.47,92.73) ; U3.55@144.251,107.699 144.251,99.749 v1(144.3,99.7)
  Bottom Layer w0.25: v1(87.37,92.73) v1(106.07,92.73) v1(124.77,92.73) 135.4,92.73 ; v1(143.47,92.73) 135.4,92.73 ; v1(144.3,99.7) 143.3,98.7 138.2,98.7 135.4,95.9 135.4,92.73
SWCLK: J1.3 U3.49 | length 11.8
  Top Layer w0.381: U3.49 141.25,106.378 143.5,104.128 143.5,99 J1.3
SWDIO: J1.4 U3.46 | length 15.4
  Top Layer w0.381: U3.46 140.15,110.75 140.7,110.2 140.7,106 142.7,104 142.7,98.283 142.674,98.257 142.674,97.714 J1.4
TEMP1: C19.2 J2.4M R2.1 U4.1 | length 34.1
  Top Layer w0.25: J2.4M 60.7,84.6 83.255,84.6 83.56,84.295 U4.1 83.56,83.799 83.398,83.638 83.158,83.638 81.23,81.71 C19.2@81.18,81.71 ; R2.1 C19.2@81.18,81.66
TEMP2: C20.2 J2.3M R3.1 U4.2 | length 38
  Top Layer w0.25: J2.3M 62.8,85 84.22,85 84.83,84.39 84.83,83.799 84.668,83.638 84.428,83.638 82.78,81.99 82.78,76 R3.1
TEMP3: C21.2 J2.2M R4.1 U4.3 | length 31
  Top Layer w0.25: J2.2M 64.925,85.375 85.115,85.375 86.1,84.39 86.1,83.221 85.173,82.295 C21.2 R4.1
TEMP4: C22.2 J2.1M R5.1 U4.4 | length 34.8
  Top Layer w0.25: J2.1M 67.05,85.75 85.95,85.75 87.37,84.33 U4.4 87.37,82.449 86.76,81.839 C22.2 86.76,75.6 R5.1
TEMP5: C23.2 J2.4L R6.1 U4.5 | length 39.9
  Top Layer w0.25: J2.4L 59.8,89.2 65.7,89.2 68.775,86.125 86.975,86.125 88.64,84.46 U4.5 88.64,83.69 89.167,83.163 R6.1
TEMP6: C24.2 J2.3L R7.1 U4.6 | length 44.1
  Top Layer w0.25: J2.3L 61.882,89.618 65.812,89.618 68.93,86.5 88,86.5 89.843,84.657 89.843,83.757 90.74,82.86 90.74,75.7 R7.1
TEMP7: C25.2 J2.2L R8.1 U4.7 | length 38.1
  Top Layer w0.25: J2.2L 63.9,90.1 65.861,90.1 69.061,86.9 88.9,86.9 91.113,84.687 91.113,83.757 93.16,81.71 R8.1@93.16,78.9
TEMP8: C26.2 J2.1L R9.1 U4.8 | length 42.3
  Top Layer w0.25: J2.1L 69.2,87.3 89.8,87.3 92.383,84.717 92.383,84.107 U4.8 92.45,83.69 94.72,81.42 94.72,75.7 R9.1
TEMP9: C27.2 J2.1J R10.1 U5.1 | length 54.7
  Top Layer w0.25: R10.1 99.89,78.81 99.89,81.4 99.907,81.417 99.907,82.412 100.2,82.705 v1(100.2,82.8) 101.44,84.04 U5.1
  Bottom Layer w0.25: J2.1J 66.5,96 66.5,84.6 68.3,82.8 v1(100.2,82.8)
TEMP10: C28.2 J2.3J R11.1 U5.2 | length 69.6
  Top Layer w0.25: R11.1 101.48,75.7 C28.2 101.49,76.21 101.49,77.64 v1(101.5,77.65) ; v1@101.48,77.55 101.48,81.99 103.128,83.638 103.368,83.638 103.53,83.799 U5.2
  Bottom Layer w0.25: J2.3J 61.4,96.1 61.4,82 65.85,77.55 83.578,77.55 83.678,77.65 v1(101.5,77.65)
TEMP11: C29.2 J2.1K R12.1 U5.3 | length 57.3
  Top Layer w0.25: R12.1 v1(103.873,80.1) C29.2 103.873,82.295 104.8,83.221 U5.3
  Bottom Layer w0.25: J2.1K 66,94 66,84.4 71.2,79.2 102.973,79.2 v1(103.873,80.1) ; v1@103.852,80.1 v1@104.118,80.1
TEMP12: C30.2 J2.3K R13.1 U5.4 | length 70.9
  Top Layer w0.25: v1(105.33,77.675) v1@105.46,77.675 ; R13.1 105.46,75.7 C30.2 v1@105.46,77.675 ; 105.46,78.2 105.46,78.025 v1@105.46,77.675 ; 105.5,78.2 105.5,82.2 106.07,82.77 U5.4
  Bottom Layer w0.25: J2.3K 61,94 61,81.87 65.77,77.1 104.755,77.1 v1(105.33,77.675)
TEMP13: C31.2 J2.2J R14.1 U5.5 | length 67.8
  Top Layer w0.25: U5.5 107.34,83.69 107.867,83.163 v1(107.867,80.1) R14.1
  Bottom Layer w0.25: J2.2J 64,96 64,81.264 66.564,78.7 103.5,78.7 104.9,80.1 v1(107.867,80.1)
TEMP14: C32.2 J2.4J R15.1 U5.6 | length 84.3
  Top Layer w0.25: U5.6 108.61,83.69 109.44,82.86 109.44,77.59 v1(109.4,77.55) ; R15.1 109.44,76 v1@109.44,77.55
  Bottom Layer w0.25: J2.4J 58.9,96.1 58.9,77.141 61.166,74.875 78.275,74.875 80.025,76.625 108.475,76.625 v1(109.4,77.55)
TEMP15: C33.2 J2.2K R16.1 U5.7 | length 70.6
  Top Layer w0.25: U5.7 109.88,83.69 111.86,81.71 v1(111.86,80.1) R16.1
  Bottom Layer w0.25: J2.2K 63.6,93.9 63.6,81.134 66.534,78.2 103.975,78.2 104.875,79.1 110.86,79.1 v1(111.86,80.1)
TEMP16: C34.2 J2.4K R17.1 U5.8 | length 89.6
  Top Layer w0.25: U5.8 111.15,83.69 113.42,81.42 ; R17.1 113.42,76 113.42,81.3
  Bottom Layer w0.25: J2.4K 58.5,94 58.5,76.6 62.3,72.8 109.4,72.8 113.4,76.8 v1(113.4,78.2)
TEMP17: C35.2 J2.4G R18.1 U6.1 | length 83.7
  Top Layer w0.25: R18.1 v1(118.58,80.1) C35.2@118.58,81.66 ; C35.2@118.58,81.71 118.647,81.777 118.647,82.047 120.431,83.831 120.798,83.831 120.96,83.993 U6.1
  Bottom Layer w0.25: J2.4G 57.8,102.5 58.55,101.75 58.55,100.036 59.611,98.975 65.786,98.975 68.825,95.936 68.825,85.775 70.8,83.8 114.88,83.8 v1(118.58,80.1)
TEMP18: C36.2 J2.4H R19.1 U6.2 | length 89
  Top Layer w0.25: R19.1@120.18,73.8 120.18,76 120.18,78.2 120.18,81.78 121.933,83.533 121.978,83.533 122.23,83.785 U6.2
  Bottom Layer w0.25: J2.4H 58.9,98.6 65.6,98.6 68.3,95.9 68.3,85.4 70.3,83.4 113.4,83.4 118.6,78.2 v1(120.2,78.2)
TEMP19: C37.2 J2.3G R20.1 U6.3 | length 83
  Top Layer w0.25: J2.3G 61.2,101.3 61.2,99.7 61.925,98.975 67.025,98.975 v1(70,96) ; R20.1 v1(122.573,80.1) C37.2 122.677,81.503 122.677,82.077 123.5,82.9 U6.3
  Bottom Layer w0.25: v1(70,96) 69.959,95.959 69.959,88.341 73.4,84.9 117.773,84.9 v1(122.573,80.1)
TEMP20: C38.2 J2.3H R21.1 U6.4 | length 88.4
  Top Layer w0.25: J2.3H 61.4,98.6 65.9,98.6 v1(69.4,95.1) ; R21.1 124.16,76 124.16,78.2 124.16,82.06 124.77,82.67 U6.4
  Bottom Layer w0.25: v1(69.4,95.1) 69.4,87.4 72.6,84.2 116.6,84.2 122.6,78.2 v1(124.2,78.2)
TEMP21: C39.2 J2.2G R22.1 U6.5 | length 83.5
  Top Layer w0.25: U6.5 126.04,83.69 126.567,83.163 v1(126.567,80.1) R22.1
  Bottom Layer w0.25: J2.2G 63.6,101.4 67.4,101.4 71.9,96.9 71.9,88.9 74.5,86.3 120.367,86.3 v1(126.567,80.1)
TEMP22: C40.2 J2.2H R23.1 U6.6 | length 90.8
  Top Layer w0.25: U6.6 127.31,83.221 127.7,82.831 127.7,78.6 v1(128.1,78.2) ; R23.1 128.14,76 v1@128.14,78.2
  Bottom Layer w0.25: J2.2H 63.5,101 66.5,101 70.9,96.6 70.9,88.8 74.1,85.6 119,85.6 126.4,78.2 v1(128.1,78.2)
TEMP23: C41.2 J2.1G R24.1 U6.7 | length 85.7
  Top Layer w0.25: J2.1G 65.1,102.4 v1(69.5,102.4) ; U6.7 128.58,83.69 130.56,81.71 v1(130.56,80.1) R24.1
  Bottom Layer w0.25: v1(69.5,102.4) 74,97.9 74,89.7 75.3,88.4 122.26,88.4 v1(130.56,80.1)
TEMP24: C42.2 J2.1H R25.1 U6.8 | length 92
  Top Layer w0.25: J2.1H v1(70,100) ; U6.8 129.85,83.69 132.12,81.42 132.12,76.1 R25.1
  Bottom Layer w0.25: v1(70,100) 73.1,96.9 73.1,89.2 74.9,87.4 121.3,87.4 130.5,78.2 v1(132.1,78.2)
TEMP25: C43.2 J2.4F R26.1 U7.1 | length 124.3
  Top Layer w0.25: R26.1 v1(137.28,80.1) C43.2 C43.2@137.28,81.66 ; C43.2@137.28,81.71 137.347,81.777 137.347,82.047 139.131,83.831 139.498,83.831 139.66,83.993 U7.1
  Bottom Layer w0.25: J2.4F 53.9,101.4 53.9,79.121 60.821,72.2 131.2,72.2 137.28,78.28 v1(137.28,80.1)
TEMP26: C44.2 J2.4E R27.1 U7.2 | length 134.1
  Top Layer w0.25: R27.1 C44.2 138.88,81.78 140.633,83.533 140.678,83.533 140.93,83.785 U7.2
  Bottom Layer w0.25: J2.4E 53.525,103.525 53.525,78.966 61.491,71 133.3,71 138.9,76.6 v1(138.9,78.2)
TEMP27: C45.2 J2.4D R28.1 U7.3 | length 137
  Top Layer w0.25: R28.1 141.287,78.813 141.287,80.087 v1(141.3,80.1) 141.287,80.113 141.287,81.387 C45.2 141.273,82.373 142.168,83.268 142.168,84.008 U7.3
  Bottom Layer w0.25: J2.4D 53.15,105.65 53.15,78.811 62.361,69.6 134.3,69.6 141.3,76.6 v1(141.3,80.1)
TEMP28: C46.2 J2.4C R29.1 U7.4 | length 146.6
  Top Layer w0.25: R29.1 C46.2 v1@142.86,78.2 ; v1(142.9,78.2) 142.9,82.4 143.47,82.97 U7.4
  Bottom Layer w0.25: J2.4C 52.775,107.775 52.775,78.655 62.93,68.5 136.1,68.5 142.9,75.3 v1(142.9,78.2) v1@142.9,78.253
TEMP29: C47.2 J2.4B R30.1 U7.5 | length 149.8
  Top Layer w0.25: U7.5 144.74,82.893 145.267,82.367 C47.2 v1(145.267,80.1) R30.1
  Bottom Layer w0.25: J2.4B 52.4,109.9 52.4,78.5 63.7,67.2 137.2,67.2 145.267,75.267 v1(145.267,80.1)
TEMP30: C48.2 J2.4A R31.1 U7.6 | length 159.9
  Top Layer w0.25: U7.6 146.01,83.221 146.8,82.431 v1(146.8,78.2) ; R31.1 C48.2 v1@146.84,78.2
  Bottom Layer w0.25: J2.4A 52,112 52,78.3 64.7,65.6 138.2,65.6 146.8,74.2 v1(146.8,78.2)
TEMP31: C49.2 J2.3F R32.1 U7.7 | length 143.7
  Top Layer w0.25: J2.3F 60,104.7 59.1,103.8 56.8,103.8 55,102 55,76.6 60.754,70.846 ; 60.8,70.8 v1(148.5,70.8) ; U7.7 147.347,83.973 147.347,83.333 148.955,81.725 149.085,81.725 149.29,81.52 149.29,80.11 v1(149.3,80.1) ; R32.1 v1@149.26,80.12
  Bottom Layer w0.25: v1@148.339,70.639 v1(148.5,70.8) 149.3,71.6 v1(149.3,80.1)
TEMP32: C50.2 J2.3E R33.1 U7.8 | length 157
  Top Layer w0.25: J2.3E 58.7,106.2 56.7,106.2 52.2,101.7 52.2,75.1 57.7,69.6 v1(149,69.6) ; U7.8 149.16,84.04 150.82,82.38 C50.2 R33.1
  Bottom Layer w0.25: v1(149,69.6) 150.8,71.4 v1(150.8,78.2)
Viso: C14.1 C15.1 R42.1 U8.10 U8.16 | length 24.8
  Top Layer w0.5: R42.1 114.1,117.4 114.74,116.76 U8.10 118.222,116.748 119.352,116.748 121.3,114.8 121.3,110.8 119.64,109.14 U8.16 118.15,109.08 113.06,109.08 C14.1
VS1_signal: J2.2A U3.15 | length 110.6
  Top Layer w0.25: J2.2A 62.5,123.4 70,130.9 v1(74.3,130.9) ; U3.15 152.15,116.75 v1(153.2,117.8)
  Bottom Layer w0.25: v1(74.3,130.9) 74.996,130.204 75.204,130.204 75.35,130.35 75.35,130.528 75.672,130.85 76.128,130.85 79.078,127.9 146.5,127.9 153.2,121.2 v1(153.2,117.8)
VS2_signal: J2.2B U3.16 | length 105.8
  Top Layer w0.25: J2.2B 63.8,116.3 63.8,118.2 v1(75.9,130.3) ; U3.16 151.423,117.25 151.933,117.76 151.933,117.933 v1(152,118)
  Bottom Layer w0.25: v1(75.9,130.3) 79.1,127.1 146.5,127.1 152,121.6 v1(152,118)
pads on no net: J2.2C J2.2D J2.2E J2.3C J2.3D J2.4 J2.5 J2.6 J2.7 U3.1 U3.2 U3.3 U3.4 U3.8 U3.9 U3.10 U3.11 U3.14 U3.17 U3.23 U3.28 U3.29 U3.30 U3.33 U3.34 U3.35 U3.36 U3.37 U3.38 U3.39 U3.40 U3.44 U3.45 U3.50 U3.51 U3.52 U3.53 U3.54 U3.58 U3.59 U3.61 U3.62 U8. U8.11 U8.14

## Polygon pours and split planes (outlines as drawn)
GND on Bottom Layer "GND_L02_P005" (solid, pour order 5): 50,54 50,151 cw(c54,151) 54,155 194,155 cw(c194,151) 198,151 198,54 cw(c194,54) 194,50 54,50 cw(c54,54)
GND_RS485 on Bottom Layer "NONET_L-01_P-001" (solid, pour order 4): 123,109 123,118.5 121.1,120.4 100.9,120.4 99,118.5 99,109 101.1,106.9 120.9,106.9
GND on Top Layer "GND_L01_P002" (solid, pour order 2): 50,54 50,151 cw(c54,151) 54,155 194,155 cw(c194,151) 198,151 198,54 cw(c194,54) 194,50 54,50 cw(c54,54)
GND_RS485 on Top Layer "NONET_L-01_P-001" (solid, pour order 1): 123,109 123,118.5 121.1,120.4 100.9,120.4 99,118.5 99,109 101.1,106.9 120.9,106.9

## Silkscreen, mask and mechanical layers (free items; w line width, h text height)
Top Overlay:
  text "ЦПТ ТМХ / БУС / Версия 1" at 71.948,124.6 h7
  text "GND" at 150.6,93 h1 r90
  text "NRST" at 148,92.2 h1 r90
  text "SWDIO" at 142.9,91.3 h1 r90
  text "SWCLK" at 145.5,91.2 h1 r90
  text "+3,3v" at 140.267,91.1 h1 r90
Mechanical 1:
  the board outline again, w0.254